# EAGLE board hbridge22 (EAGLE 7.6.0)
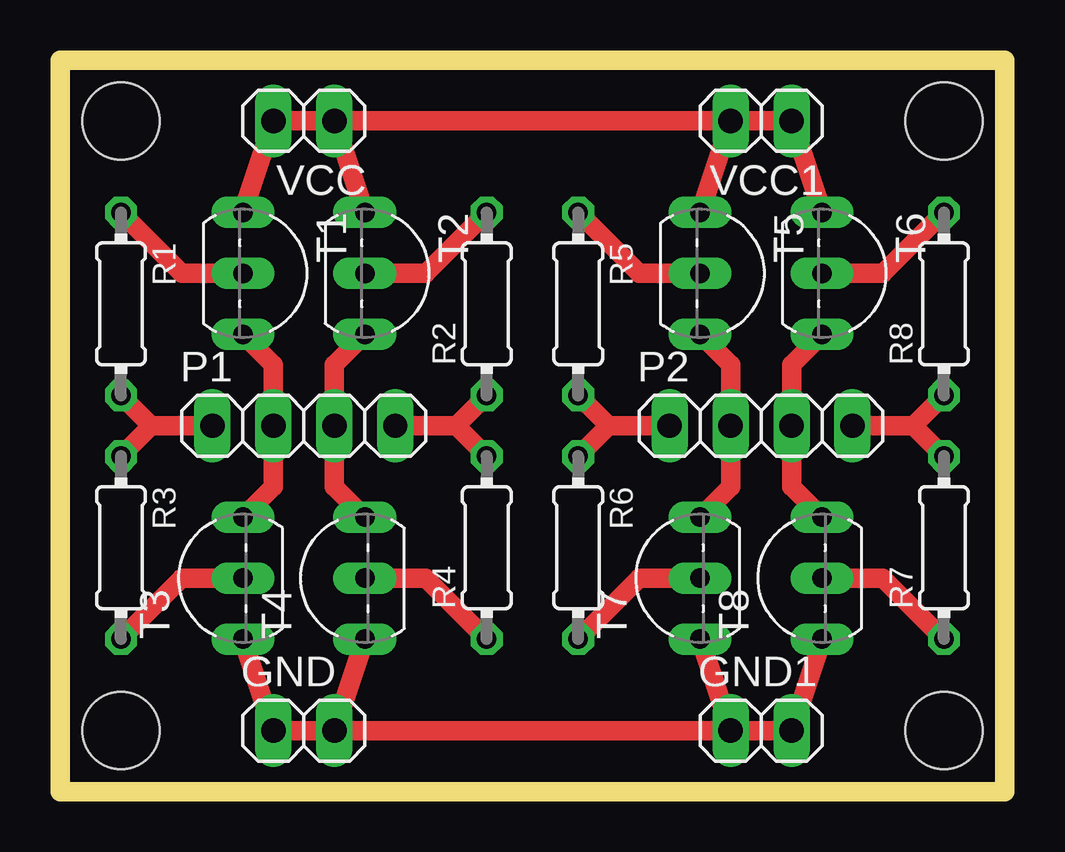
[diagram p0: board, top side]

Size 39.37 x 30.48 mm. Coordinates in mm from the lower left corner, seen from the top.
Outline: 0,0 0,30.48 39.37,30.48 39.37,0 0,0
Copper layers (1*16): Top 0.035mm / dielectric 1.5mm / Bottom 0.035mm
Design rules "default": minimum track width 10mil, minimum drill 24mil, track to track 8mil, track to pad 8mil, pad to pad 8mil, via to via 8mil, smd to smd 8mil, copper to edge 40mil, drill to drill 8mil, minimum pad ring 10mil, minimum via ring 8mil, stop-mask expansion 4mil, vias tented up to drill 0mil, thermal gap 10mil
Holes 3.2 mm at 2.54,2.54 2.54,27.94 36.83,2.54 36.83,27.94

## Footprints (pad centres in the part's own frame; a part is rotated, then mirrored left to right if it is on the bottom)
1X02 = drill 1.016 long: 1 -1.27,0; 2 1.27,0
1X04 = drill 1.016 long: 1 -3.81,0; 2 -1.27,0; 3 1.27,0; 4 3.81,0
0204/7 = drill 0.813 octagon: 1 -3.81,0; 2 3.81,0
TO92-EBC = drill 0.813 long: B 0,-1.27; C 2.54,-1.27; E -2.54,-1.27

## Placement (x,y rotation side)
GND  [1X02]  10.16,2.54 0 top
GND1  [1X02]  29.21,2.54 0 top
P1  [1X04]  10.16,15.24 0 top
P2  [1X04]  29.21,15.24 0 top
R1  [0204/7]  2.54,20.32 270 top
R2  [0204/7]  17.78,20.32 90 top
R3  [0204/7]  2.54,10.16 270 top
R4  [0204/7]  17.78,10.16 90 top
R5  [0204/7]  21.59,20.32 270 top
R6  [0204/7]  21.59,10.16 270 top
R7  [0204/7]  36.83,10.16 90 top
R8  [0204/7]  36.83,20.32 90 top
T1  [TO92-EBC]  8.89,21.59 270 top
T2  [TO92-EBC]  13.97,21.59 270 top
T3  [TO92-EBC]  6.35,8.89 90 top
T4  [TO92-EBC]  11.43,8.89 90 top
T5  [TO92-EBC]  27.94,21.59 270 top
T6  [TO92-EBC]  33.02,21.59 270 top
T7  [TO92-EBC]  25.4,8.89 90 top
T8  [TO92-EBC]  30.48,8.89 90 top
VCC  [1X02]  10.16,27.94 180 top
VCC1  [1X02]  29.21,27.94 180 top

## Library data of the parts
GND GND1 P1 P2 VCC VCC1 = pinhead
R1-R8 = resistor
T1-T8 = transistor

## Nets
S$1: R1.1 T1.B
S$2: P1.1 R1.2 R3.1
S$3: P1.2 T1.C T3.C
S$4: P1.3 T2.C T4.C
S$5: P1.4 R2.1 R4.2
S$6: R4.1 T4.B
S$7: R3.2 T3.B
S$8: R2.2 T2.B
S$9: GND1.1 GND1.2 GND.1 GND.2 T3.E T4.E T7.E T8.E
S$10: T1.E T2.E T5.E T6.E VCC1.1 VCC1.2 VCC.1 VCC.2
S$13: R5.1 T5.B
S$14: P2.1 R5.2 R6.1
S$15: P2.2 T5.C T7.C
S$16: P2.3 T6.C T8.C
S$17: P2.4 R7.2 R8.1
S$18: R7.1 T8.B
S$19: R6.2 T7.B
S$20: R8.2 T6.B

## Tracks (layer width: path | path; a pad name or v marks a point on that pad's centre or on a via)
S$1
  Top 0.813: R1.1 5.08,21.59 T1.B
S$2
  Top 0.813: R1.2 3.81,15.24 | 3.81,15.24 P1.1 | R3.1 3.81,15.24
S$3
  Top 0.813: T3.C 8.89,12.7 P1.2 8.89,17.78 T1.C
S$4
  Top 0.813: T2.C 11.43,17.78 P1.3 11.43,12.7 T4.C
S$5
  Top 0.813: R4.2 16.51,15.24 | 16.51,15.24 P1.4 | R2.1 16.51,15.24
S$6
  Top 0.813: T4.B 15.24,8.89 R4.1
S$7
  Top 0.813: T3.B 5.08,8.89 R3.2
S$8
  Top 0.813: R2.2 15.24,21.59 T2.B
S$9
  Top 0.813: GND.2 GND.1 T3.E | T4.E GND.2 | GND1.1 GND1.2 T8.E | T7.E GND1.1 | GND.2 GND1.1
S$10
  Top 0.813: VCC.1 VCC.2 T1.E | T2.E VCC.1 | VCC1.2 VCC1.1 T6.E | VCC1.2 T5.E | VCC.1 VCC1.2
S$13
  Top 0.813: R5.1 24.13,21.59 T5.B
S$14
  Top 0.813: R5.2 22.86,15.24 | 22.86,15.24 P2.1 | R6.1 22.86,15.24
S$15
  Top 0.813: T7.C 27.94,12.7 P2.2 27.94,17.78 T5.C
S$16
  Top 0.813: T6.C 30.48,17.78 P2.3 30.48,12.7 T8.C
S$17
  Top 0.813: R7.2 35.56,15.24 | 35.56,15.24 P2.4 | R8.1 35.56,15.24
S$18
  Top 0.813: T8.B 34.29,8.89 R7.1
S$19
  Top 0.813: T7.B 24.13,8.89 R6.2
S$20
  Top 0.813: R8.2 34.29,21.59 T6.B